# EAGLE board arduino (EAGLE 7.1.0)
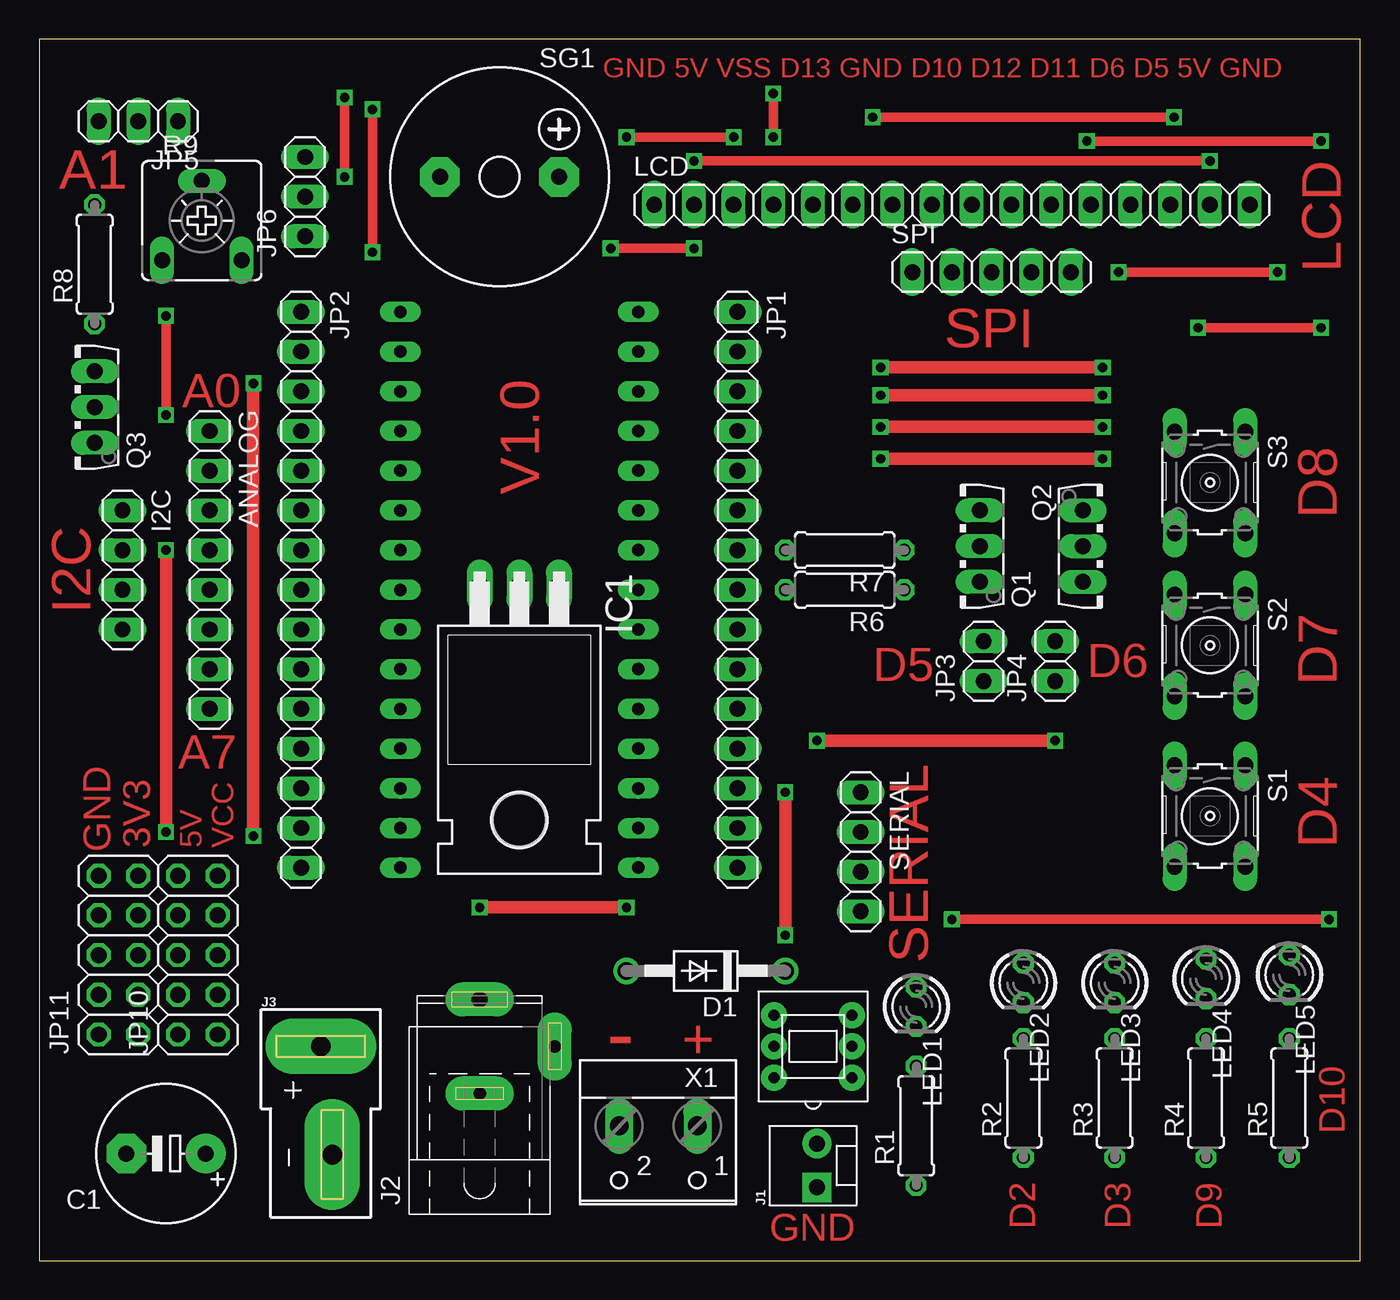
[diagram p0: board, top side]
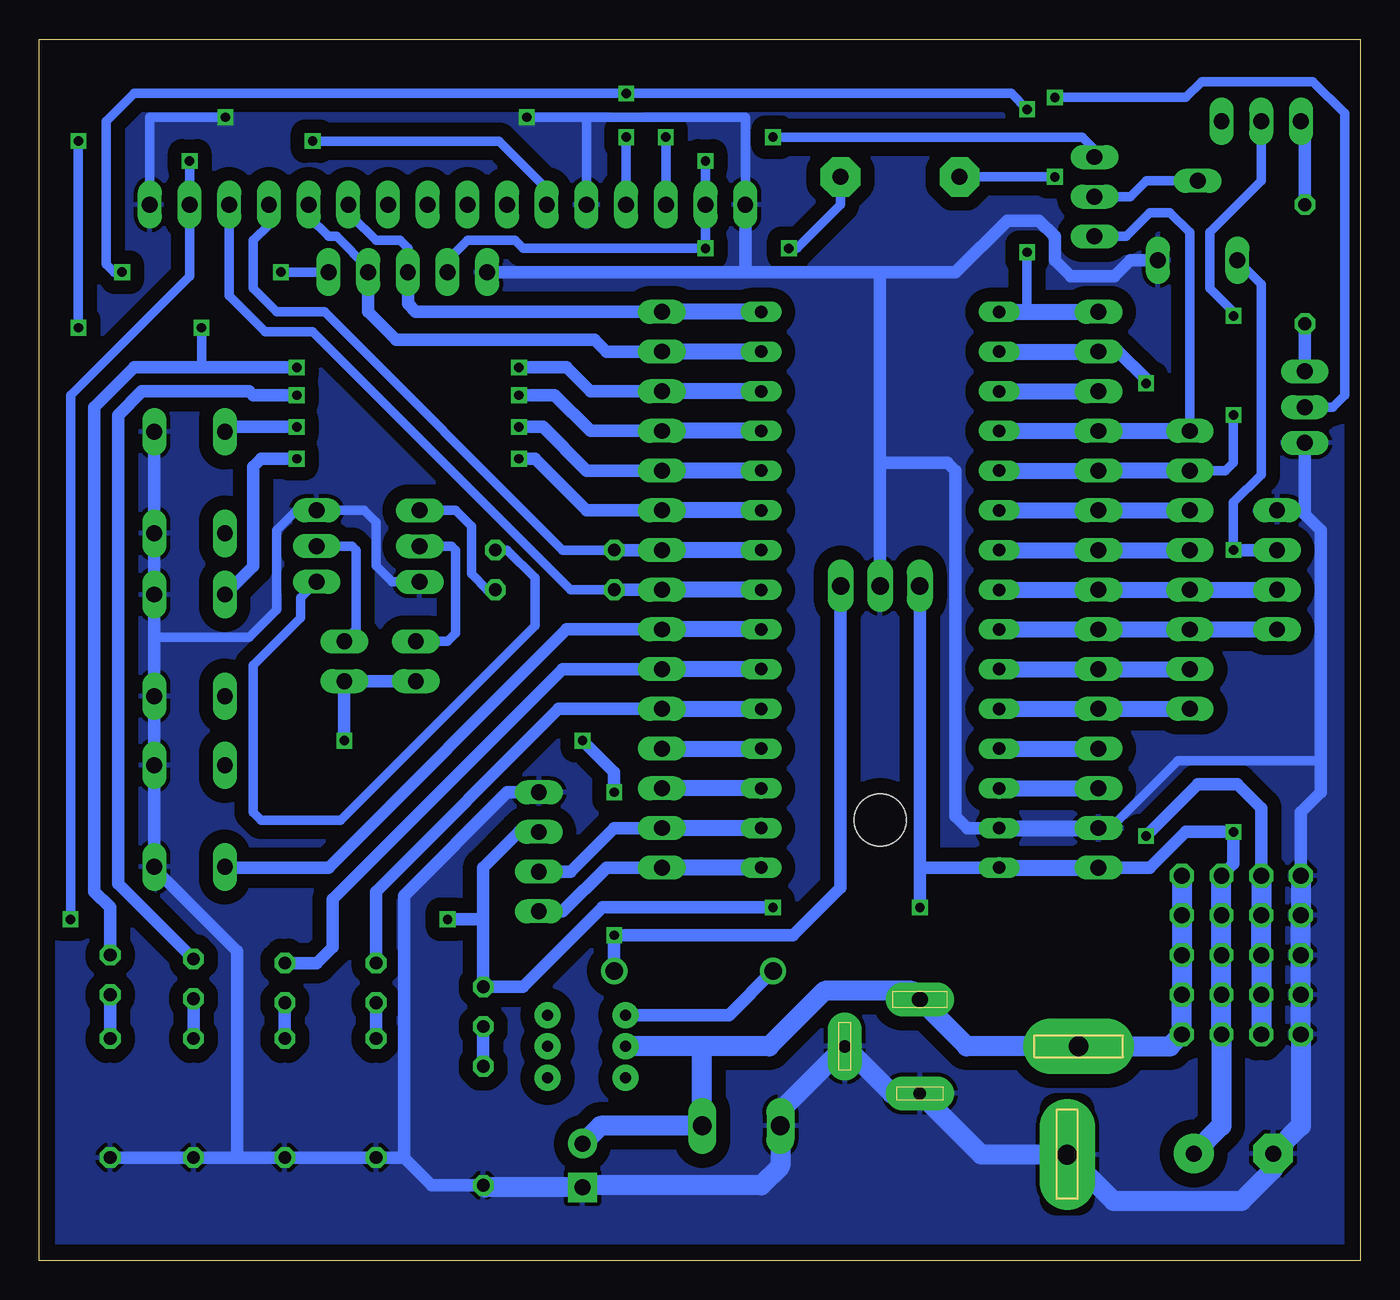
[diagram p1: board, bottom side, seen from below]

Size 84.56 x 78.16 mm. Coordinates in mm from the lower left corner, seen from the top.
Outline: 0,0 84.56,0 84.56,78.16 0,78.16 0,0
Copper layers (1*16): Top 0.035mm / dielectric 1.5mm / Bottom 0.035mm
Design rules "default *": minimum track width 10mil, minimum drill 24mil, track to track 35mil, track to pad 35mil, pad to pad 8mil, via to via 8mil, smd to smd 8mil, copper to edge 40mil, drill to drill 8mil, minimum pad ring 10mil, minimum via ring 8mil, stop-mask expansion 4mil, vias tented up to drill 0mil, thermal gap 10mil

## Footprints (pad centres in the part's own frame; a part is rotated, then mirrored left to right if it is on the bottom)
1X08 = drill 1.016 long: 1 -8.89,0; 2 -6.35,0; 3 -3.81,0; 4 -1.27,0; 5 1.27,0; 6 3.81,0; 7 6.35,0; 8 8.89,0
E5-8,5 = drill 1.016 pad 2.54: + -2.54,0 | drill 1.016 pad 2.54 octagon: - 2.54,0
DO41-10 = drill 1.118: A 5.08,0; C -5.08,0
1X04 = drill 1.016 long: 1 -3.81,0; 2 -1.27,0; 3 1.27,0; 4 3.81,0
TO220H = drill 1.118 long: 1 -2.54,-10.16; 2 0,-10.16; 3 2.54,-10.16 | hole 3.302: 0,4.826
MOLEX-1X2_LOCK = drill 1.016 pad 1.88 square: 1 -0.127,0 | drill 1.016 pad 1.88: 2 2.667,0
SPC4077 = drill 0.8 pad 2.184 long: 1 -3,0; 2 0,-4.8 | drill 1 pad 2.184 long: 3 3,0
DEANS = drill 1.27 pad 3.556 long: + 0,0; - 0.737,-6.921
1X15 = drill 1.016 long: 1 -17.78,0; 2 -15.24,0; 3 -12.7,0; 4 -10.16,0; 5 -7.62,0; 6 -5.08,0; 7 -2.54,0; 8 0,0; 9 2.54,0; 10 5.08,0; 11 7.62,0; 12 10.16,0; 13 12.7,0; 14 15.24,0; 15 17.78,0
1X02 = drill 1.016 long: 1 -1.27,0; 2 1.27,0
1X03 = drill 1.016 long: 1 -2.54,0; 2 0,0; 3 2.54,0
2X05 = drill 1.016 octagon: 1 -5.08,-1.27; 2 -5.08,1.27; 3 -2.54,-1.27; 4 -2.54,1.27; 5 0,-1.27; 6 0,1.27; 7 2.54,-1.27; 8 2.54,1.27; 9 5.08,-1.27; 10 5.08,1.27
1X16 = drill 1.016 long: 1 -19.05,0; 2 -16.51,0; 3 -13.97,0; 4 -11.43,0; 5 -8.89,0; 6 -6.35,0; 7 -3.81,0; 8 -1.27,0; 9 1.27,0; 10 3.81,0; 11 6.35,0; 12 8.89,0; 13 11.43,0; 14 13.97,0; 15 16.51,0; 16 19.05,0
LED3MM = drill 0.813 octagon: A -1.27,0; K 1.27,0
TO126AV = drill 1.016 long: B 2.286,-1.27; C 0,-1.27; E -2.286,-1.27
0207/7 = drill 0.813 octagon: 1 -3.81,0; 2 3.81,0
CA6V = drill 1.016 long: A -2.54,-2.54; E 2.54,-2.54; S 0,2.54
B3F-10XX = drill 1.016 long: 1 -3.251,2.261; 2 3.251,2.261; 3 -3.251,-2.261; 4 3.251,-2.261
F/CM12P = drill 1.016 pad 2.54 octagon: + 3.81,0; - -3.81,0
1X05 = drill 1.016 long: 1 -5.08,0; 2 -2.54,0; 3 0,0; 4 2.54,0; 5 5.08,0
NANO = drill 0.8 long: 3.3V -10.16,24.13; 5V -10.16,-1.27; A0 -10.16,19.05; A1 -10.16,16.51; A2 -10.16,13.97; A3 -10.16,11.43; A4 -10.16,8.89; A5 -10.16,6.35; A6 -10.16,3.81; A7 -10.16,1.27; AREF -10.16,21.59; D2 5.08,1.27; D3 5.08,3.81; D4 5.08,6.35; D5 5.08,8.89; D6 5.08,11.43; D7 5.08,13.97; D8 5.08,16.51; D9 5.08,19.05; D10 5.08,21.59; D11 5.08,24.13; D12 5.08,26.67; D13 -10.16,26.67; GND -10.16,-6.35; GND1 5.08,-1.27; RAW -10.16,-8.89; RST -10.16,-3.81; RST1 5.08,-3.81; RX1 5.08,-6.35; TX0 5.08,-8.89 | drill 0.8: ICSP1 5.08,-8.89; ICSP2 -10.16,-8.89; ICSP3 5.08,-6.35; ICSP4 -10.16,-6.35; ICSP5 5.08,-3.81; ICSP6 -10.16,-3.81
BUTTON-DPDT-7MM = drill 0.7 pad 1.676: 1 -2,-2.5; 2 0,-2.5; 3 2,-2.5; 4 2,2.5; 5 0,2.5; 6 -2,2.5
W237-102 = drill 1.194 long: 1 -2.5,-1.27; 2 2.5,-1.27

## Placement (x,y rotation side)
ANALOG  [1X08]  10.92,44.2 270 top
C1  [E5-8,5]  8.13,6.86 180 top
D1  1N4004  [DO41-10]  42.67,18.54 180 top
I2C  [1X04]  5.33,44.2 270 top
IC1  7805T  [TO220H]  30.73,33.02 180 top
J1  [MOLEX-1X2_LOCK]  49.78,4.83 90 top
J2  [SPC4077]  28.19,13.72 90 top
J3  [DEANS]  18.03,13.72 0 top
JP1  [1X15]  44.7,42.93 270 top
JP2  [1X15]  16.76,42.93 270 top
JP3  [1X02]  60.45,38.35 90 top
JP4  [1X02]  65.02,38.35 90 top
JP5  [1X03]  6.35,72.9 180 top
JP6  [1X03]  17.02,68.07 90 top
JP10  [2X05]  10.16,19.56 90 top
JP11  [2X05]  5.08,19.56 90 top
LCD  [1X16]  58.42,67.56 0 top
LED1  [LED3MM]  56.13,16.26 270 top
LED2  [LED3MM]  62.99,17.78 270 top
LED3  [LED3MM]  68.83,17.78 270 top
LED4  [LED3MM]  74.68,18.03 270 top
LED5  [LED3MM]  80.01,18.29 270 top
Q1  BD139  [TO126AV]  58.93,45.72 90 top
Q2  BD139  [TO126AV]  68.07,45.72 270 top
Q3  BD139  [TO126AV]  2.29,54.61 90 top
R1  330  [0207/7]  56.13,8.64 90 top
R2  1K  [0207/7]  62.99,10.41 90 top
R3  1K  [0207/7]  68.83,10.41 90 top
R4  1K  [0207/7]  74.68,10.41 90 top
R5  1K  [0207/7]  80.01,10.41 90 top
R6  330  [0207/7]  51.56,42.93 180 top
R7  330  [0207/7]  51.56,45.47 180 top
R8  330  [0207/7]  3.56,63.75 90 top
R9  [CA6V]  10.41,66.55 0 top
S1  [B3F-10XX]  74.93,28.45 270 top
S2  [B3F-10XX]  74.93,39.37 270 top
S3  [B3F-10XX]  74.93,49.78 270 top
SERIAL  [1X04]  52.58,26.16 270 top
SG1  F/CM12P  [F/CM12P]  29.46,69.34 0 top
SPI  [1X05]  60.96,63.25 0 top
U$1  NANO  [NANO]  33.27,34.04 0 top
U$2  BUTTON-DPDT-7MM  [BUTTON-DPDT-7MM]  49.53,13.72 90 top
X1  [W237-102]  39.62,7.37 180 top

## Library data of the parts
ANALOG I2C JP1-JP6 JP10 JP11 LCD SERIAL SPI = pinhead
C1 R1-R8 = rcl
D1 = diode
IC1 = linear
J1 = SparkFun-Connectors; SF_ID: PRT-09918
J2 = con-jack; OC_FARNELL: unknown; OC_NEWARK: unknown
J3 = SparkFun-Connectors; SF_ID: PRT-11864
LED1-LED5 = led
Q1-Q3 = transistor-power
R9 = pot
S1-S3 = switch-omron; MPN: B3F-1000; OC_FARNELL: 176432; OC_NEWARK: 36M3542
SG1 = buzzer; OC_FARNELL: unknown; OC_NEWARK: unknown
U$1 = Arduino-clone
U$2 = button-dpdt-7mm
X1 = con-wago-500; MPN: 237-102; OC_FARNELL: unknown; OC_NEWARK: 70K9898

## Nets
3V3: JP2.2 JP11.1 JP11.3 JP11.5 JP11.7 JP11.9 U$1.3.3V
5.5V: JP2.12 U$1.5V
5V: C1.+ I2C.2 IC1.3 JP2.15 JP10.2 JP10.4 JP10.6 JP10.8 JP10.10 LCD.2 LCD.15 LED1.A R9.A SERIAL.2 SG1.+ SPI.2 U$1.RAW
A0: ANALOG.1 JP2.4 JP6.1 U$1.A0
A1: ANALOG.2 JP2.5 JP5.2 U$1.A1
A2: ANALOG.3 JP2.6 U$1.A2
A3: ANALOG.4 JP2.7 U$1.A3
A4: ANALOG.5 I2C.3 JP2.8 U$1.A4
A5: ANALOG.6 I2C.4 JP2.9 U$1.A5
A6: ANALOG.7 JP2.10 U$1.A6
A7: ANALOG.8 JP2.11 U$1.A7
D2: JP1.11 LED2.A U$1.D2
D3: JP1.10 LED3.A U$1.D3
D4: JP1.9 S1.4 U$1.D4
D5: JP1.8 LCD.14 R6.2 U$1.D5
D6: JP1.7 LCD.13 R7.2 U$1.D6
D7: JP1.6 S2.3 U$1.D7
D8: JP1.5 S3.3 U$1.D8
D9: JP1.4 LED4.A U$1.D9
D10: JP1.3 LCD.6 LED5.A U$1.D10
D11: JP1.2 LCD.12 SPI.4 U$1.D11
D12: JP1.1 LCD.11 SPI.3 U$1.D12
D13: JP2.1 LCD.4 SPI.5 U$1.D13
GND: C1.- I2C.1 IC1.2 J1.1 J2.1 J2.2 J3.- JP2.14 JP11.2 JP11.4 JP11.6 JP11.8 JP11.10 LCD.1 LCD.5 LCD.16 Q1.E Q2.E Q3.E R1.1 R2.1 R3.1 R4.1 R5.1 R9.E S1.1 S1.2 S2.1 S2.2 S3.1 S3.2 SERIAL.1 SPI.1 U$1.GND X1.2
GND2: JP1.12 U$1.GND1
N$1: D1.A U$2.4
N$2: Q3.B R8.1
N$3: LED2.K R2.2
N$4: LED1.K R1.2
N$5: LED3.K R3.2
N$6: LED4.K R4.2
N$7: LED5.K R5.2
N$8: Q1.B R6.1
N$9: Q2.B R7.1
N$10: JP3.2 Q1.C
N$11: JP4.2 Q2.C
N$12: Q3.C SG1.-
N$13: JP5.3 R8.2
N$17: LCD.7
N$18: LCD.8
N$19: LCD.9
N$20: LCD.10
N$27: JP6.2 R9.S
REF: JP2.3 U$1.AREF
RST: JP2.13 U$1.RST
RST1: JP1.13 U$1.RST1
RX: JP1.14 SERIAL.3 U$1.RX1
TX: JP1.15 SERIAL.4 U$1.TX0
VCC: J1.2 J2.3 J3.+ JP10.1 JP10.3 JP10.5 JP10.7 JP10.9 U$2.5 X1.1
VE: JP6.3 LCD.3
VIN: D1.C IC1.1 JP3.1 JP4.1

## Tracks (layer width: path | path; a pad name or v marks a point on that pad's centre or on a via)
3V3  (via drill 0.6)
  Top 0.813: v13.72,27.18 v13.72,56.13
  Bottom 0.813: JP11.9 6.35,28.96 7.87,30.48 10.41,30.48 v13.72,27.18 | v13.72,56.13 13.72,56.39 15.49,58.17 JP2.2
  Bottom 1.016: U$1.3.3V JP2.2
  Bottom 1.27: JP11.9 JP11.7 JP11.5 JP11.3 JP11.1
5.5V
  Bottom 1.016: U$1.5V JP2.12
5V  (via drill 0.6)
  Top 0.61: v82.55,21.84 v58.42,21.84 | v74.93,70.36 v41.91,70.36 | v41.91,64.77 v36.58,64.77
  Top 0.813: v37.59,22.61 v28.19,22.61 | v8.13,27.43 v8.13,45.47
  Bottom 0.61: SPI.2 58.42,64.01 57.15,65.28 54.1,65.28 53.59,64.77 v41.91,64.77 LCD.2 v41.91,70.36 | v82.55,21.84 82.55,55.37 74.93,62.99 LCD.15 v74.93,70.36 | v8.13,45.47 8.13,48.51 6.35,50.29 6.35,62.48 R9.A | v36.58,64.77 36.07,64.77 33.27,67.56 SG1.+
  Bottom 0.813: IC1.3 28.19,25.15 | SERIAL.2 53.85,27.43 56.13,25.15 56.13,21.84 | 56.13,21.84 LED1.A 53.59,17.53 48.51,22.61 v37.59,22.61 | v58.42,21.84 56.13,21.84 | v28.19,22.61 28.19,25.15 | U$1.RAW 28.19,25.15 | 8.89,24.89 JP10.10 8.13,25.4 v8.13,27.43 11.18,27.43 13.46,25.15 JP2.15 | I2C.2 v8.13,45.47
  Bottom 1.016: U$1.RAW JP2.15
  Bottom 1.27: JP10.10 JP10.8 JP10.6 JP10.4 JP10.2 8.89,8.64 C1.+
A0
  Bottom 0.61: ANALOG.1 10.92,65.79 12.19,67.06 13.46,67.06 14.99,65.53 JP6.1
  Bottom 1.016: U$1.A0 JP2.4 ANALOG.1
A1  (via drill 0.6)
  Top 0.61: v8.13,54.1 v8.13,60.45
  Bottom 0.61: ANALOG.2 8.64,50.55 8.13,51.05 v8.13,54.1 | v8.13,60.45 8.13,60.71 9.65,62.23 9.65,65.79 6.35,69.09 JP5.2
  Bottom 1.016: U$1.A1 JP2.5 ANALOG.2
A2
  Bottom 1.016: U$1.A2 JP2.6 ANALOG.3
A3
  Bottom 1.016: U$1.A3 JP2.7 ANALOG.4
A4
  Bottom 1.016: U$1.A4 JP2.8 | JP2.8 ANALOG.5 | JP2.8 I2C.3
A5
  Bottom 1.016: U$1.A5 JP2.9 | JP2.9 ANALOG.6 | JP2.9 I2C.4
A6
  Bottom 1.016: U$1.A6 JP2.10 ANALOG.7
A7
  Bottom 1.016: U$1.A7 JP2.11 ANALOG.8
D2
  Bottom 0.813: LED2.A 62.99,23.62 51.31,35.31 JP1.11
  Bottom 1.016: JP1.11 U$1.D2
D3
  Bottom 0.813: LED3.A 66.8,19.05 65.79,20.07 65.79,23.11 51.05,37.85 JP1.10
  Bottom 1.016: U$1.D3 JP1.10
D4
  Bottom 0.813: U$1.D4 50.8,40.39 66.04,25.15 72.62,25.15 S1.4
  Bottom 1.016: U$1.D4 JP1.9
D5
  Bottom 0.61: R6.2 50.55,42.93 67.06,59.44 70.1,59.44 72.39,61.72 LCD.14
  Bottom 0.813: 44.2,42.93 R6.2
  Bottom 1.016: U$1.D5 44.2,42.93 JP1.8
D6
  Bottom 0.61: R7.2 51.05,45.47 66.29,60.71 69.34,60.71 70.87,62.23 70.87,65.28 69.85,66.29 LCD.13
  Bottom 0.813: JP1.7 R7.2
  Bottom 1.016: U$1.D6 JP1.7
D7  (via drill 0.6)
  Top 0.813: v53.85,51.31 v68.07,51.31
  Bottom 0.813: U$1.D7 49.53,48.01 52.83,51.31 v53.85,51.31 | v68.07,51.31 70.36,51.31 70.87,50.8 70.87,44.43 S2.3
  Bottom 1.016: U$1.D7 JP1.6
D8  (via drill 0.6)
  Top 0.813: v53.85,53.34 v68.07,53.34
  Bottom 0.813: JP1.5 49.53,50.55 52.32,53.34 v53.85,53.34 | v68.07,53.34 72.37,53.34 S3.3
  Bottom 1.016: U$1.D8 JP1.5
D9  (via drill 0.6)
  Top 0.813: v53.85,55.37 v68.07,55.37
  Bottom 0.813: LED4.A 79.5,24.13 79.5,54.1 77.98,55.63 71.12,55.63 70.87,55.37 v68.07,55.37 | JP1.4 49.28,53.09 51.56,55.37 v53.85,55.37
  Bottom 1.016: U$1.D9 JP1.4
D10  (via drill 0.6)
  Top 0.61: v67.06,71.63 v82.04,71.63 | v82.04,59.69 v74.17,59.69
  Top 0.813: v53.85,57.15 v68.07,57.15
  Bottom 0.61: LCD.6 52.07,68.58 55.12,71.63 v67.06,71.63 | v82.04,71.63 v82.04,59.69 | v74.17,59.69 74.17,57.15
  Bottom 0.813: LED5.A 80.01,22.61 81.03,23.62 81.03,54.61 78.49,57.15 74.17,57.15 v68.07,57.15 | JP1.3 49.28,55.63 50.8,57.15 v53.85,57.15
  Bottom 1.016: U$1.D10 JP1.3
D11
  Bottom 0.61: SPI.4 63.5,63.5 65.53,65.53 66.04,65.53 67.31,66.8 LCD.12
  Bottom 0.813: SPI.4 63.5,60.71 61.72,58.93 49.02,58.93 48.26,58.17 JP1.2
  Bottom 1.016: U$1.D11 JP1.2
D12
  Bottom 0.61: SPI.3 60.96,64.77 61.47,65.28 62.99,65.28 64.52,66.8 64.52,67.31 LCD.11
  Bottom 0.813: JP1.1 60.45,60.71 60.96,61.21 SPI.3
  Bottom 1.016: U$1.D12 JP1.1
D13  (via drill 0.6)
  Top 0.61: v46.99,74.68 v46.99,71.88 | v69.09,63.25 v79.25,63.25 | v21.34,73.66 v21.34,64.52
  Bottom 0.61: v46.99,71.88 LCD.4 | SPI.5 v69.09,63.25 | v79.25,63.25 79.76,63.25 80.26,63.75 80.26,72.9 78.49,74.68 v46.99,74.68 22.35,74.68 v21.34,73.66 | v21.34,64.52 21.34,60.96 21.08,60.71
  Bottom 1.016: U$1.D13 21.08,60.71 JP2.1
GND  (via drill 0.6)
  Top 0.61: v53.34,73.15 v72.64,73.15
  Bottom 0.61: Q1.E 61.98,43.43 62.99,44.45 62.99,47.24 63.75,48.01 Q2.E 68.07,48.01 69.34,46.74 69.34,41.66 71.12,39.88 76.94,39.88 77.19,39.62 | LCD.16 77.47,73.15 v72.64,73.15 | LCD.1 39.37,73.15 49.53,73.15 | LCD.5 49.53,73.15 | 49.53,73.15 v53.34,73.15 | JP2.14 16,27.69 11.68,32 2.79,32 2.54,31.75
  Bottom 0.813: 22.61,27.69 25.15,27.69 25.91,28.45 25.91,50.55 26.42,51.05 30.73,51.05 | 72.14,6.6 R3.1 R2.1 61.21,6.6 | 72.14,6.6 R4.1 R5.1 | R1.1 59.44,4.83 61.21,6.6 | IC1.2 30.73,51.05 | 30.73,63.25 30.73,51.05 | SPI.1 39.37,63.25 | 39.37,63.25 LCD.1 | SERIAL.1 54.61,29.97 61.21,23.37 61.21,6.6 | JP11.10 3.81,28.7 2.54,29.97 2.54,31.75 2.54,46.74 3.56,47.75 | Q3.E 3.56,47.75 | I2C.1 3.81,48.01 3.56,47.75 | R9.E 14.73,64.01 15.75,62.99 18.54,62.99 19.56,64.01 19.56,65.53 20.57,66.55 22.61,66.55 25.91,63.25 30.73,63.25 | 39.37,63.25 30.73,63.25 | S3.1 S3.2 S2.1 77.19,39.62 S2.2 S1.1 S1.2 77.19,25.12 71.88,19.81 71.88,6.86 72.14,6.6
  Bottom 1.016: U$1.GND 22.61,27.69 JP2.14
  Bottom 1.27: R1.1 56.01,4.7 J1.1 49.66,4.83 38.35,4.83 37.12,6.06 X1.2 37.12,9.59 J2.2 29.99,10.72 J2.1 24.27,6.8 J3.- 15.79,3.81 7.62,3.81 5.59,5.84 C1.- 3.81,8.64 JP11.2 JP11.4 JP11.6 JP11.8 JP11.10
  pour Bottom: 0,78.23 84.58,78.23 84.58,0 0,0
GND2
  Bottom 1.016: JP1.12 U$1.GND1
N$1
  Bottom 0.813: U$2.4 40.42,15.72 D1.A
N$2
  Bottom 0.813: R8.1 Q3.B
N$3
  Bottom 0.813: LED2.K R2.2
N$4
  Bottom 0.813: LED1.K R1.2
N$5
  Bottom 0.813: LED3.K R3.2
N$6
  Bottom 0.813: LED4.K R4.2
N$7
  Bottom 0.813: LED5.K R5.2
N$8
  Bottom 0.61: R6.1 55.88,42.93 56.9,43.94 56.9,46.99 57.91,48.01 Q1.B
N$9
  Bottom 0.61: R7.1 54.61,45.47 52.83,43.69 52.83,40.64 65.28,28.19 70.36,28.19 70.87,28.7 70.87,38.1 67.82,41.15 67.82,42.42 Q2.B
N$10
  Bottom 0.61: Q1.C 58.17,45.72 57.91,45.47 57.91,40.13 58.42,39.62 JP3.2
N$11
  Bottom 0.61: Q2.C 64.52,45.72 64.26,45.47 64.26,40.39 JP4.2
N$12  (via drill 0.6)
  Top 0.61: v19.56,69.34 v19.56,74.42
  Bottom 0.61: SG1.- v19.56,69.34 | v19.56,74.42 11.18,74.42 10.16,75.44 3.05,75.44 1.02,73.41 1.02,55.37 1.78,54.61 Q3.C
N$13
  Bottom 0.813: R8.2 3.56,72.64 JP5.3
N$27
  Bottom 0.61: R9.S 13.72,69.09 14.73,68.07 JP6.2
REF
  Bottom 1.016: U$1.AREF JP2.3
RST
  Bottom 1.016: U$1.RST JP2.13
RST1
  Bottom 1.016: U$1.RST1 JP1.13
RX
  Bottom 0.813: SERIAL.3 50.55,24.89 47.75,27.69 JP1.14
  Bottom 1.016: U$1.RX1 JP1.14
TX
  Bottom 0.813: SERIAL.4 51.05,22.35 48.26,25.15 JP1.15
  Bottom 1.016: U$1.TX0 JP1.15
VCC
  Bottom 1.27: J1.2 48.64,8.64 X1.1 42.12,13.68 42.16,13.72 | 42.16,13.72 37.85,13.72 34.29,17.27 28.7,17.27 28.19,16.76 J2.3 25.19,13.72 J3.+ 12.19,13.72 JP10.1 JP10.3 JP10.5 JP10.7 JP10.9 | 42.16,13.72 U$2.5
VE  (via drill 0.6)
  Top 0.61: v37.59,71.88 v44.45,71.88
  Bottom 0.61: v44.45,71.88 LCD.3 | v37.59,71.88 17.78,71.88 17.02,71.12 JP6.3
VIN  (via drill 0.6)
  Top 0.813: v47.75,20.83 v47.75,29.97 | v49.78,33.27 v65.02,33.27
  Bottom 0.813: IC1.1 33.27,23.88 36.32,20.83 v47.75,20.83 D1.C | v47.75,29.97 47.75,31.24 v49.78,33.27 | v65.02,33.27 JP4.1 JP3.1

## Text on the board
Top: GND 5V VSS D13 GND D10 D12 D11 D6 D5 5V GND | A1 | LCD | SPI | A0 | V1.0 | I2C | D8 | D5 | D6 | D7 | A7 | GND | 3V3 | 5V | VCC | D4 | SERIAL | + | - | D10 | D2 | D3 | D9 | GND